# Altium PCB 400861.PcbDoc (part 5 of 7)
Units mm, origin at the board's own origin, x right, y up, seen from the top; angles counter-clockwise.
Board outline 145 x 63.5 mm, 8 copper layers (Top Side, Mid-Layer 1, Mid-Layer 2, Mid-Layer 3, Mid-Layer 4, Mid-Layer 5, Mid-Layer 6, Bottom Side), stack 1.529 mm thick; 287 components, 241 nets, 1164 pads, 3527 vias.
Unrouted connection lines stored in the file: 1.
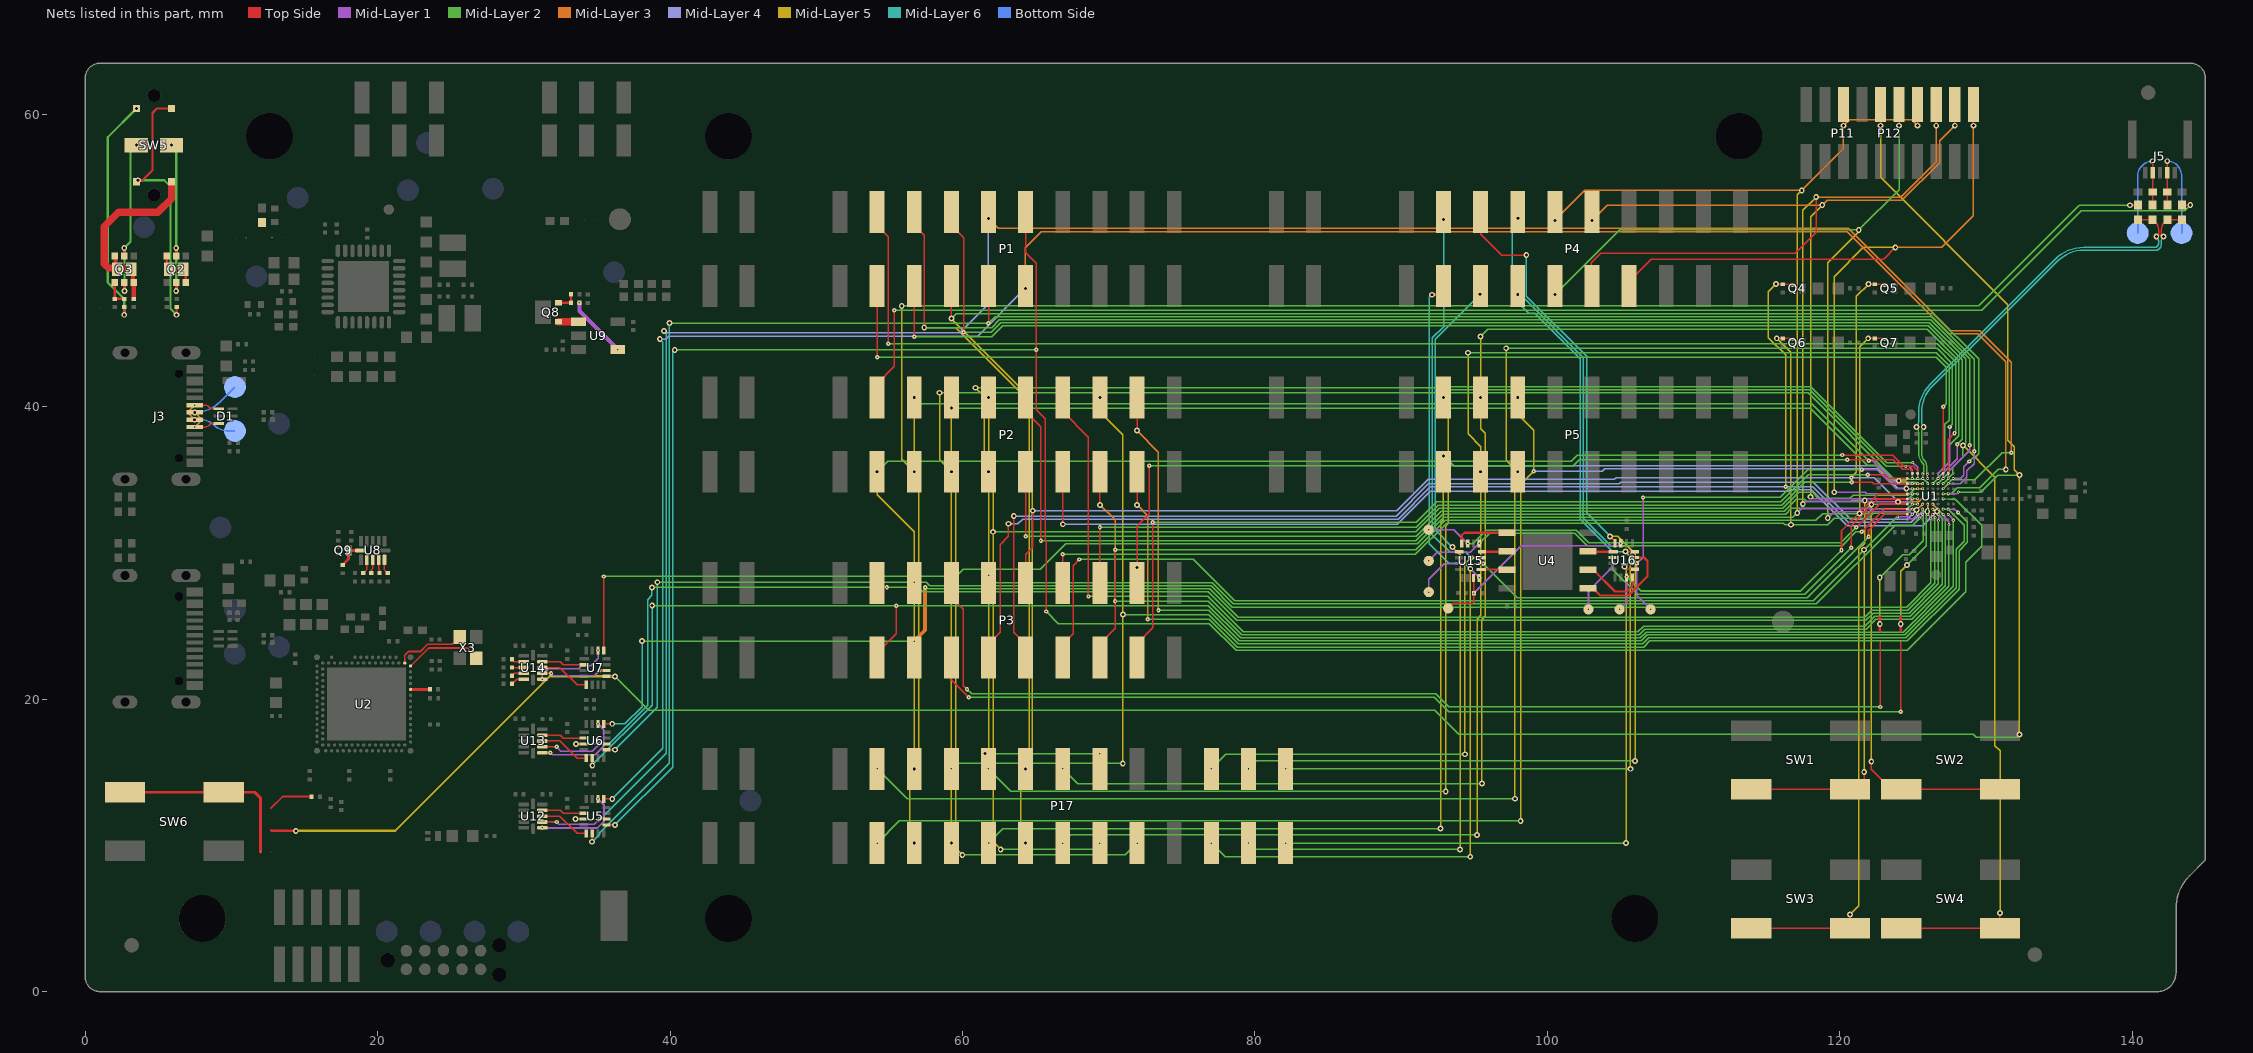
[diagram p10: the nets of this part, all layers, seen from the top]

## Via types
v1: diameter 0.4, hole 0.2, Top Side to Bottom Side, tented both sides, 2409 vias
v2: diameter 0.3, hole 0.1, Top Side to Mid-Layer 1, tented both sides, 307 vias
v3: diameter 0.3, hole 0.1, Mid-Layer 1 to Mid-Layer 2, tented both sides, 204 vias
v4: diameter 0.4, hole 0.2, Mid-Layer 3 to Mid-Layer 4, tented both sides, 199 vias
v5: diameter 0.3, hole 0.1, Mid-Layer 2 to Mid-Layer 3, tented both sides, 98 vias
v6: diameter 0.3, hole 0.1, Mid-Layer 4 to Mid-Layer 5, tented both sides, 82 vias
v7: diameter 0.3, hole 0.1, Mid-Layer 2 to Mid-Layer 3, 70 vias
v8: diameter 0.2, hole 0.1, Top Side to Mid-Layer 1, tented both sides, 64 vias
v9: diameter 0.2, hole 0.1, Mid-Layer 1 to Mid-Layer 2, tented both sides, 41 vias
v10: diameter 0.2, hole 0.1, Mid-Layer 2 to Mid-Layer 3, 17 vias
v11: diameter 0.2, hole 0.1, Mid-Layer 2 to Mid-Layer 3, tented both sides, 14 vias
v12: diameter 0.3, hole 0.1, Mid-Layer 5 to Mid-Layer 6, tented both sides, 12 vias
v13: diameter 0.2, hole 0.1, Mid-Layer 1 to Mid-Layer 2, 4 vias
v14: diameter 0.3, hole 0.1, Top Side to Mid-Layer 1, tented top, 3 vias
v15: diameter 0.2, hole 0.1, Top Side to Mid-Layer 1, tented top, 2 vias
v16: diameter 0.225, hole 0.1, Mid-Layer 1 to Mid-Layer 2, tented both sides, 1 vias

## Nets (pads, with @x,y where several pads share a name; then routed paths per layer and width w, separated by ;. In a path a pad name is that pad's centre, name@x,y a point inside that pad or via, vN(x,y) a via of type N, cw(c..) or ccw(c..) an arc to the next point about the centre after c; other vN are vias at no path point) (continued)
NetQ2_2: Q2.2 Q2.5 SW5.5 | length 11.2
  Top Side w0.15: v1(6.22,47.931) Q2.2@6.22,48.506 ; Q2.5@6.22,50.316 v1(6.22,50.862)
  Mid-Layer 2 w0.15: v1(5.9,57.9) 6.22,57.581 v1(6.22,50.862) v1(6.22,47.931)
NetQ2_3: Q2.3 Q2.6 | length 2.9
  Top Side w0.15: Q2.6@5.57,50.316 5.57,49.586 Q2.6@5.745,49.411 Q2.3@6.695,49.411 6.87,49.236 Q2.3@6.87,48.506
NetQ3_1: Q3.1 R22.2 R24.1 SB6.1 | length 1.8
  Top Side w0.15: Q3.1@2.02,48.506 R24.1@2.02,47.391 R22.2@2.675,47.391
NetQ3_2: Q3.2 Q3.5 SW5.2 | length 11.4
  Top Side w0.15: Q3.2@2.67,48.506 2.672,48.503 2.672,47.934 v1(2.675,47.931) ; Q3.5@2.67,50.316 v1(2.67,50.862)
  Mid-Layer 2 w0.15: v1(2.675,47.931) 2.675,50.857 v1(2.67,50.862) 3.1,51.292 3.1,57.5 v1(3.5,57.9)
NetQ3_3: Q3.3 Q3.6 R23.1 SW5.6 | length 14.7
  Top Side w0.3: Q3.6@2.02,50.316 2.072,50.264 2.072,49.534 Q3.6@2.195,49.411 ; Q3.3@3.145,49.411 3.268,49.288 3.268,48.558 Q3.3@3.32,48.506 R23.1@3.32,47.391
  Top Side w0.5: 1.438,49.655 1.3,49.793 ; 1.8,49.5 Q3.6@2.09,49.5 ; Q3.3@3.145,49.411 3.055,49.5 2.195,49.5 Q3.6@2.09,49.5 ; SW5.6@5.9,55.4 5.9,54.234 4.966,53.3 2.269,53.3 1.3,52.331 1.3,49.793 ; 1.3,49.793 1.593,49.5 Q3.6@2.09,49.5
NetQ8_1: Q8.1 U9.1 | length 1.4
  Top Side w0.508: Q8.1@32.368,45.816 U9.1@33.733,45.816
NetQ8_2: Q8.2 R52.1 R54.2 | length 1.4
  Top Side w0.152: Q8.2@32.368,47.116 R54.2@33.229,47.116 R52.1@33.229,47.693
NetQ9_3: Q9.3 R39.1 U8.12 | length 2
  Top Side w0.203: R39.1@17.601,29.189 18.01,29.598 Q9.3@18.01,30.176 U8.12@18.814,30.176
NetR6_2: R6.2 U8.2 | length 1
  Top Side w0.106: R6.2@19.007,28.62 19.264,28.878 U8.2@19.264,29.536
NetR8_1: R8.1 U2.L31 | length 1.3
  Top Side w0.2: U2.L31@22.25,20.675 R8.1@23.565,20.675
NetR12_2: R12.2 U8.3 | length 1
  Top Side w0.106: R12.2@19.567,28.622 19.567,28.841 19.664,28.938 U8.3@19.664,29.536
NetR13_2: R13.2 U8.4 | length 0.9
  Top Side w0.106: U8.4@20.064,29.536 20.064,28.881 20.128,28.817 R13.2@20.128,28.623
NetR16_1: R16.1 SB17.2 SB18.1
NetR21_2: R21.2 SW5.3 SW5.4 | length 18.5
  Top Side w0.15: v1(3.6,55.5) 3.918,55.5 4.6,56.182 4.6,60.1 4.9,60.4 SW5.4@5.9,60.4 ; v1(6.24,46.294) 6.245,46.299 R21.2@6.245,46.821
  Mid-Layer 2 w0.15: v1(3.6,55.5) 5.406,55.5 5.824,55.082 5.824,46.709 v1(6.24,46.294)
NetR22_1: R22.1 SW5.1 | length 15.9
  Top Side w0.15: v1(2.67,46.294) 2.675,46.299 R22.1@2.675,46.821
  Mid-Layer 2 w0.15: v1(2.67,46.294) 2.67,47.37 1.537,48.503 1.537,58.437 v1(3.5,60.4)
NetR35_1: R35.1 SB22.2 | length 3.1
  Top Side w0.125: SB22.2@12.7,12.55 13.491,13.341 R35.1@15.475,13.341
NetR47_2: R47.2 U8.5 | length 1
  Top Side w0.106: U8.5@20.464,29.536 20.464,28.848 R47.2@20.689,28.623
NetR48_2: R48.2 U14.2 | length 0.9
  Top Side w0.1: R48.2@29.178,22.731 29.342,22.567 U14.2@29.989,22.567
NetR49_2: R49.2 U14.3 | length 0.8
  Top Side w0.1: R49.2@29.178,22.174 29.185,22.167 U14.3@29.989,22.167
NetR50_2: R50.2 U14.4 | length 0.9
  Top Side w0.1: R50.2@29.178,21.617 29.328,21.767 U14.4@29.989,21.767
NetR54_1: R54.1 U9.4 | length 4.3
  Mid-Layer 1 w0.254: v2(33.799,47.116) 33.799,46.547 v2@36.43,43.916
  other v2: 36.433,43.916
NetR56_1: R56.1 SB5.2 TP34.1 U15.15 U16.15 | length 15.1
  Top Side w0.1: TP34.1@93.221,26.216 93.557,26.552 SB5.2@94.981,26.552 v2(94.981,27.262) 94.981,27.559 94.95,27.591 U15.15@94.95,28.308
  Mid-Layer 1 w0.1: v2(94.981,27.262) 98.206,30.487 104.84,30.487 v2(105.023,30.67)
NetR57_2: R57.2 U14.5 | length 0.9
  Top Side w0.1: R57.2@29.178,21.06 29.193,21.06 29.501,21.367 U14.5@29.989,21.367
NetSB22_1: SB22.1 SB25.2 SB26.1 SW6.2 | length 13.1
  Top Side w0.2: SW6.2@2.721,13.637 SW6.2@9.471,13.637 11.587,13.637 12,13.224 SB22.1@12,12.55 SB25.2@12,11.05 SB26.1@12,9.55
NetU2_B30: U2.B30 X3.3 | length 4.8
  Top Side w0.125: U2.B30@21.85,22.475 21.85,23.023 22.09,23.263 22.908,23.263 23.408,23.763 25.108,23.763 X3.3@25.6,24.255
NetU2_C31: U2.C31 X3.1 | length 5.3
  Top Side w0.125: U2.C31@22.25,22.275 22.274,22.275 23.512,23.513 26.109,23.513 26.75,22.872 X3.1@26.75,22.805
NetU5_2: U5.2 U12.10 | length 2.9
  Top Side w0.1: U12.10@31.269,12.406 32.488,12.406 32.688,12.206 U5.2@34.095,12.206
NetU5_5: U5.5 U12.9 | length 3.5
  Top Side w0.1: U12.9@31.269,12.006 32.462,12.006 33.637,10.831 U5.5@34.27,10.831
NetU5_10: U5.10 U12.8 | length 5
  Top Side w0.1: U12.8@31.269,11.606 v2(32.238,11.606) ; v2(35.173,11.806) U5.10@35.645,11.806
  Mid-Layer 1 w0.1: 31.857,11.606 v2(32.238,11.606) 32.402,11.442 34.809,11.442 v2(35.173,11.806)
NetU5_14: U5.14 U12.7 | length 6.1
  Top Side w0.125: v2(31.264,11.206) U12.7@31.269,11.206
  Mid-Layer 1 w0.125: v2(31.264,11.206) 35.034,11.206 35.487,11.658 35.487,12.764 v2(35.07,13.181)
NetU6_2: U6.2 U13.10 | length 2.9
  Top Side w0.1: U13.10@31.269,17.546 32.488,17.546 32.688,17.346 U6.2@34.095,17.346
NetU6_5: U6.5 U13.9 | length 3.5
  Top Side w0.1: U13.9@31.269,17.146 32.462,17.146 33.637,15.971 U6.5@34.27,15.971
NetU6_10: U6.10 U13.8 | length 4.7
  Top Side w0.1: U13.8@31.269,16.746 v2(32.238,16.746) ; v2(35.173,16.946) U6.10@35.645,16.946
  Mid-Layer 1 w0.1: v2(32.238,16.746) 32.536,16.449 34.675,16.449 v2(35.173,16.946)
NetU6_14: U6.14 U13.7 | length 6.2
  Top Side w0.1: U13.7@31.269,16.346 v2(31.814,16.346)
  Mid-Layer 1 w0.1: v2(31.814,16.346) 31.961,16.199 34.877,16.199 35.473,16.795 35.473,17.918 v2(35.07,18.322)
NetU7_2: U7.2 U14.10 | length 2.9
  Top Side w0.1: U14.10@31.269,22.567 32.488,22.567 32.688,22.367 U7.2@34.095,22.367
NetU7_5: U7.5 U14.9 | length 3.5
  Top Side w0.1: U14.9@31.269,22.167 32.462,22.167 33.637,20.992 U7.5@34.27,20.992
NetU7_10: U7.10 U14.8 | length 4.6
  Top Side w0.1: U14.8@31.269,21.767 v2(31.857,21.767) ; v2(35.173,21.967) U7.10@35.645,21.967
  Mid-Layer 1 w0.1: v2(31.857,21.767) 32.013,21.612 34.817,21.612 v2(35.173,21.967)
NetU7_14: U7.14 U14.7 | length 5.1
  Top Side w0.1: v2(31.269,21.369) v2(31.269,21.369)
  Mid-Layer 1 w0.1: v2(31.269,21.369) 31.269,21.688 31.676,22.095 33.756,22.095 33.959,22.298 34.573,22.298 35.07,22.794 v2(35.07,23.342)
NFC1_N: C56.1 J5.2 R33.2 TP26.1 | length 8.5
  Top Side w0.1: R33.2@142.4,53.8 142.4,54.055 142.4,54.495 C56.1@142.4,54.7 142.4,54.905 J5.2@142.4,56 v1(142.4,56.8)
  Bottom Side w0.1: v1(142.4,56.8) cw(c142.4,55.825) 143.376,55.825 TP26.1@143.376,51.885
NFC2_P: C57.2 J5.4 R34.2 TP28.1 | length 8.5
  Top Side w0.1: R34.2@141.4,53.8 141.4,54.055 141.4,54.495 C57.2@141.4,54.7 141.4,54.905 J5.4@141.4,56 v1(141.4,56.8)
  Bottom Side w0.1: TP28.1@140.376,51.885 140.376,55.776 cw(c141.4,55.776) v1(141.4,56.8)
NFC_N: R3.2 R33.1 U1.J6 | length 29.4
  Top Side w0.1: v1(142.15,51.656) 142.003,51.656 142,51.659 142,52.143 cw(c142.621,52.143) 142.182,52.582 R33.1@142.4,52.8 R3.2@143.4,52.8
  Mid-Layer 1 w0.1: v13(125.985,35.392) 125.985,35.186 ccw(c126.106,35.186) v8(126.02,35.1)
  Mid-Layer 2 w0.1: v5(125.741,38.611) ccw(c126.103,38.248) 125.591,38.248 125.591,36.817 ccw(c126.299,36.817) 125.798,36.316 cw(c125.468,35.985) 125.935,35.985 125.935,35.513 ccw(c126.105,35.513) v13(125.985,35.392)
  Mid-Layer 6 w0.1: v5(125.741,38.611) cw(c126.103,38.973) 125.591,38.973 125.591,39.616 cw(c128.131,39.616) 126.335,41.412 128.973,44.05 128.975,44.05 129.297,44.372 129.297,44.374 134.887,49.964 cw(c136.683,48.168) 136.683,50.708 141.598,50.708 ccw(c141.598,51.055) 141.843,50.809 141.904,50.871 ccw(c141.674,51.102) 142,51.102 142,51.35 cw(c142.375,51.35) 142.11,51.616 v1(142.15,51.656)
  other v4: 125.741,38.611
  other v6: 125.741,38.611
  other v12: 125.741,38.611
NFC_P: R4.2 R34.1 U1.J7 | length 29.3
  Top Side w0.1: R4.2@140.4,52.8 R34.1@141.4,52.8 141.618,52.582 cw(c141.179,52.143) 141.8,52.143 141.8,51.659 141.797,51.656 v1(141.65,51.656)
  Mid-Layer 1 w0.1: v8(125.67,35.1) ccw(c125.635,35.136) 125.685,35.136 v13(125.685,35.4)
  Mid-Layer 2 w0.1: v5(125.241,38.611) cw(c124.878,38.248) 125.391,38.248 125.391,36.817 ccw(c126.299,36.817) 125.657,36.174 cw(c125.468,35.985) 125.735,35.985 125.735,35.521 cw(c125.564,35.521) v13(125.685,35.4)
  Mid-Layer 6 w0.1: v5(125.241,38.611) ccw(c124.878,38.973) 125.391,38.973 125.391,39.616 cw(c128.131,39.616) 126.193,41.553 127.55,42.91 128.89,44.25 128.892,44.25 129.097,44.455 129.097,44.457 134.745,50.105 cw(c136.683,48.168) 136.683,50.908 141.563,50.908 ccw(c141.563,51.139) 141.726,50.976 ccw(c141.548,51.154) 141.8,51.154 141.8,51.35 ccw(c141.425,51.35) 141.69,51.616 v1(141.65,51.656)
  other v4: 125.241,38.611
  other v6: 125.241,38.611
  other v12: 125.241,38.611
nRF54_N: D1.4 J3.A7 J3.B7 TP22.1 | length 6
  Top Side w0.099: v2(7.485,40.12) 8.127,40.12 cw(c8.127,39.554) 8.527,39.955 ccw(c8.73,40.158) 8.73,39.87 D1.4@9.135,39.87
  Mid-Layer 3 w0.09: v1(7.484,39.12) 7.203,39.401 cw(c7.438,39.636) 7.105,39.636 cw(c7.356,39.636) 7.179,39.814 v2(7.485,40.12)
  Bottom Side w0.099: v1(7.484,39.12) 7.942,39.12 cw(c7.942,37.927) 8.785,38.77 ccw(c9.793,39.778) 9.793,38.353 TP22.1@10.236,38.353
  other v3: 7.485,40.12
  other v5: 7.485,40.12
nRF54_P: D1.6 J3.A6 J3.B6 TP23.1 | length 6.4
  Top Side w0.099: v2(7.485,38.621) 8.174,38.621 ccw(c8.174,39.109) 8.519,38.764 cw(c8.776,38.507) 8.776,38.87 D1.6@9.135,38.87
  Mid-Layer 3 w0.09: v2(7.485,38.621) 7.791,38.927 ccw(c7.614,39.105) 7.865,39.105 ccw(c7.532,39.105) 7.767,39.34 v1(7.487,39.62)
  Bottom Side w0.099: v1@7.485,39.62 ccw(c7.485,42.08) 9.224,40.341 TP23.1@10.236,41.353
  other v3: 7.485,38.621
  other v5: 7.485,38.621
nRF54_RESET: P11.10 P12.10 SB25.1 U1.F2 U7.9 | length 178.8
  Top Side w0.1: U7.9@35.645,21.567 v1(36.221,21.567) ; v1(122.787,59.228) P12.10@122.787,60.676
  Top Side w0.15: SB25.1@12.7,11.05 12.75,11 v1(14.4,11)
  Mid-Layer 1 w0.1: v8(127.42,34.05) 127.994,34.05 v13(128.11,34.166)
  Mid-Layer 2 w0.1: v1(36.221,21.567) 38.549,19.239 92.304,19.239 93.943,17.6 129.13,17.6 129.327,17.403 132.09,17.403 v5(132.287,17.6) ; v13(128.11,34.166) 129.635,34.166 130.805,35.336 v5(132.289,35.336)
  Mid-Layer 5 w0.1: v1(122.787,59.228) 122.787,55.714 131.503,46.998 131.503,37.71 131.942,37.271 131.942,35.683 v5(132.289,35.336) ; v5(132.287,17.6) v6@132.287,35.335
  Mid-Layer 5 w0.15: v1(14.4,11) 21.2,11 31.767,21.567 v1(36.221,21.567)
  other v4: 132.287,17.6 132.289,35.336
  other v6: 132.287,17.6 132.289,35.336
P0.00: P1.3 U1.K3 | length 85.1
  Top Side w0.1: v2(54.16,43.393) 54.16,43.682 ; 54.16,43.596 54.16,43.682 ; P1.3@54.16,47.67 54.16,43.682 ; U1.K3@127.07,35.45 v3(127.071,40.004)
  Mid-Layer 2 w0.1: v2(54.16,43.393) 126.588,43.393 127.268,42.713 127.268,40.202 v3(127.071,40.004)
  other v2: 127.071,40.004
  other v3: 54.16,43.393
P0.01: P1.4 U1.K2 | length 90.1
  Top Side w0.1: P1.4@54.16,52.75 54.16,52.397 54.912,51.645 v2@54.912,44.321 ; U1.K2@127.42,35.45 127.42,37.756 v3(127.846,38.182)
  Mid-Layer 2 w0.1: v2(54.911,44.321) 126.675,44.321 127.923,43.074 127.923,38.259 v3(127.846,38.182)
  other v2: 127.846,38.182
  other v3: 54.911,44.321
P0.02: P1.5 U1.J3 | length 84.5
  Top Side w0.1: v2(56.7,44.799) P1.5@56.7,47.67
  Mid-Layer 1 w0.1: v8(127.07,35.1) 127.07,35.505 128.025,36.459 128.025,36.832 v3(128.025,37.438)
  Mid-Layer 2 w0.1: v2(56.7,44.799) 61.989,44.799 62.745,45.556 126.047,45.556 128.384,43.219 128.384,37.797 v3(128.025,37.438)
  other v3: 56.7,44.799
P0.03: P1.6 P17.11 U1.J2 | length 129.1
  Top Side w0.1: P1.6@56.7,52.75 56.7,52.414 57.383,51.731 v3(57.383,45.422)
  Mid-Layer 1 w0.1: v8(127.419,35.102) 127.419,35.558 128.884,37.023 v3(128.884,37.379)
  Mid-Layer 2 w0.1: v3(57.383,45.422) 61.992,45.422 62.526,45.956 126.233,45.956 128.884,43.305 v3(128.884,37.379)
  Mid-Layer 5 w0.1: v3(57.383,45.422) 59.551,45.422 64.578,40.395 64.578,15.964 63.999,15.385 63.999,10.481 v6(64.32,10.16)
  other v2: 64.32,10.16 57.383,45.422
  other v3: 64.32,10.16
  other v4: 64.32,10.16 57.383,45.422
  other v5: 64.32,10.16 57.383,45.422
  other v6: 57.383,45.422
P0.04: P1.7 P17.12 U1.J1 | length 115.8
  Top Side w0.1: v3(59.24,46.041) P1.7@59.24,47.67
  Mid-Layer 1 w0.1: v15(127.77,35.1) 128.266,35.1 128.488,35.322 128.488,35.886 v3(128.866,36.264)
  Mid-Layer 2 w0.1: v3(59.24,46.041) 59.583,46.384 126.387,46.384 129.497,43.273 129.497,36.79 129.322,36.614 129.217,36.614 v3(128.866,36.264)
  Mid-Layer 5 w0.1: v3(59.24,46.041) 64.785,40.496 64.785,15.705 v2(64.32,15.24)
  other v2: 59.24,46.041
  other v3: 64.32,15.24
  other v4: 64.32,15.24 59.24,46.041
  other v5: 64.32,15.24 59.24,46.041
  other v6: 64.32,15.24 59.24,46.041
P0.05: P1.8 SW4.2 U1.H3 | length 127.8
  Top Side w0.1: P1.8@59.24,52.75 59.24,52.392 60.081,51.551 v2(60.081,45.114) ; SW4.2@124.209,4.35 SW4.2@130.959,4.35 130.959,5.376 v1(130.961,5.378)
  Mid-Layer 2 w0.1: v2(60.081,45.114) 61.975,45.114 62.617,45.756 126.137,45.756 128.606,43.287 128.606,37.537 v5(128.428,37.359) 128.428,36.567 127.742,35.881 127.742,35.422 v9(127.07,34.75)
  Mid-Layer 5 w0.1: v6@128.444,37.359 130.608,35.195 130.608,16.826 130.961,16.473 v1(130.961,5.378)
  other v3: 60.081,45.114
  other v4: 128.428,37.359
  other v6: 128.428,37.359
  other v8: 127.07,34.75
P0.06: P1.9 U1.H2 U5.6 | length 140.6
  Top Side w0.1: v1(34.67,10.255) U5.6@34.67,10.831 ; v3(61.771,45.723) 61.78,45.733 P1.9@61.78,47.67
  Mid-Layer 1 w0.1: v8(127.42,34.75) 128.256,34.75 128.693,35.187 128.693,35.615 129.197,36.119 v3(129.197,36.964)
  Mid-Layer 2 w0.1: v5(39.949,45.723) 40.841,45.723 v3(61.771,45.723) 62.225,46.178 126.302,46.178 129.209,43.27 129.209,36.976 v3(129.197,36.964)
  Mid-Layer 6 w0.1: v1(34.67,10.255) 35.18,10.765 35.18,10.87 39.949,15.64 v5(39.949,45.723)
  other v2: 61.771,45.723
  other v4: 39.949,45.723
  other v6: 39.949,45.723
  other v12: 39.949,45.723
P0.07: P1.10 U1.G3 U5.3 | length 152.4
  Top Side w0.1: v1(33.519,11.806) U5.3@34.095,11.806
  Mid-Layer 2 w0.095: v9(127.07,34.4) 127.669,34.999
  Mid-Layer 2 w0.1: 127.669,34.999 129.245,34.999 131.105,36.859 131.729,36.859 v5(131.735,36.865)
  Mid-Layer 3 w0.1: v1(61.775,52.875) 62.45,52.2 120.591,52.2 127.591,45.2 129.569,45.2 131.735,43.034 v5(131.735,36.865)
  Mid-Layer 4 w0.1: v12(39.578,45.181) 39.702,45.057 59.825,45.057 61.775,47.007 v1(61.775,52.875)
  Mid-Layer 6 w0.1: v1(33.519,11.806) 35.232,11.806 39.745,16.319 39.745,45.014 v12(39.578,45.181)
  other v4: 39.578,45.181
  other v6: 39.578,45.181
  other v8: 127.07,34.4
P0.08: P1.11 U1.F3 U5.13 | length 146.3
  Top Side w0.1: U5.13@35.47,13.181 v1(36.046,13.181)
  Mid-Layer 2 w0.1: v9(127.07,34.05) 127.625,34.05 128.026,34.451 129.562,34.451 130.827,35.716 v1(131.357,35.716)
  Mid-Layer 3 w0.1: v1(64.3,48.1) 64.3,50.879 65.393,51.972 120.522,51.972 127.495,44.998 129.446,44.998 131.357,43.088 v1(131.357,35.716)
  Mid-Layer 4 w0.1: v12(39.298,44.636) 39.71,44.636 39.911,44.837 61.036,44.837 v1(64.3,48.1)
  Mid-Layer 6 w0.1: v1(36.046,13.181) 39.511,16.646 39.511,44.423 v12(39.298,44.636)
  other v4: 39.298,44.636
  other v6: 39.298,44.636
  other v8: 127.07,34.05
P0.09: P1.12 U1.E3 U5.9 | length 160.8
  Top Side w0.1: U5.9@35.645,11.406 v1(36.221,11.406) ; P1.12@64.32,52.75 64.32,50.547 65.043,49.824 v2(65.043,43.898) 65.043,39.807 65.662,39.188 65.662,30.913 65.722,30.854 v3(65.722,26.003)
  Mid-Layer 2 w0.1: v5(40.316,43.898) 41.423,43.898 v2(65.043,43.898) ; v3(65.722,26.003) 66.554,25.172 76.89,25.172 78.706,23.356 124.617,23.356 128.608,27.347 128.608,29.37 129.699,30.461 129.699,31.911 127.915,33.695 127.468,33.695 v8(127.07,33.7)
  Mid-Layer 6 w0.1: v1(36.221,11.406) 40.179,15.364 40.179,43.761 v5(40.316,43.898)
  other v2: 65.722,26.003
  other v3: 65.043,43.898
  other v4: 40.316,43.898
  other v6: 40.316,43.898
  other v9: 127.07,33.7
  other v12: 40.316,43.898
P1.00: P2.3 P17.5 U1.K8 | length 99
  Top Side w0.1: v2(120.167,36.705) 123.612,36.705 124.386,35.93 125.011,35.93 125.32,35.621 U1.K8@125.32,35.45
  Mid-Layer 2 w0.1: v6(54.161,35.559) 54.892,36.29 101.643,36.29 102.059,36.705 v2(120.167,36.705)
  Mid-Layer 5 w0.1: v6(54.161,35.559) 54.161,34.003 56.7,31.464 56.7,15.674 56.397,15.371 56.397,10.463 v6(56.7,10.16)
  other v2: 56.7,10.16 54.161,35.559
  other v3: 56.7,10.16 54.161,35.559 120.167,36.705
  other v4: 56.7,10.16 54.161,35.559
  other v5: 56.7,10.16 54.161,35.559
P1.01: P2.4 R3.1 | length 99.2
  Top Side w0.1: P2.4@54.16,40.05 54.16,41.584 55.343,42.767 v2(55.343,46.6) ; R3.1@143.4,53.8 143.404,53.805 v1(143.97,53.805)
  Mid-Layer 2 w0.1: v2(55.343,46.6) 129.7,46.6 136.516,53.416 143.581,53.416 v1(143.97,53.805)
  other v3: 55.343,46.6
P1.02: P2.5 R4.1 | length 99.1
  Top Side w0.1: v1(139.841,53.786) 140.386,53.786 R4.1@140.4,53.8
  Mid-Layer 2 w0.1: v5(55.842,46.902) 129.502,46.902 136.357,53.757 cw(c136.427,53.686) 136.427,53.786 v1(139.841,53.786)
  Mid-Layer 5 w0.1: v5(55.842,46.902) 55.842,36.418 v6(56.7,35.56)
  other v2: 56.7,35.56
  other v3: 56.7,35.56
  other v4: 56.7,35.56 55.842,46.902
  other v5: 56.7,35.56
  other v6: 55.842,46.902
P1.03: P2.6 P17.6 U1.H9 | length 96.4
  Mid-Layer 1 w0.1: v3(121.995,36.314) 122.252,36.314 123.816,34.75 v8(124.97,34.75)
  Mid-Layer 2 w0.1: v3(56.7,40.64) 57.115,40.225 118.084,40.225 v3(121.995,36.314)
  Mid-Layer 5 w0.1: v6@56.69,40.64 56.69,36.548 57,36.238 57,15.54 v6(56.7,15.24)
  other v2: 56.7,15.24 56.7,40.64
  other v3: 56.7,15.24
  other v4: 56.7,15.24 56.7,40.64
  other v5: 56.7,15.24 56.7,40.64
  other v6: 56.7,40.64
P1.04: P2.7 P17.7 U1.J9 | length 100.6
  Mid-Layer 1 w0.1: v9(124.513,35.925) 124.744,35.925 124.97,35.699 v8(124.97,35.1)
  Mid-Layer 2 w0.1: v5(58.431,40.964) 92.387,40.963 92.582,41.159 117.944,41.159 123.177,35.925 v9(124.513,35.925)
  Mid-Layer 5 w0.1: v5(58.431,40.964) 58.431,36.369 v6(59.24,35.56) v6(59.24,10.16)
  other v2: 59.24,10.16 59.24,35.56
  other v3: 59.24,10.16 59.24,35.56
  other v4: 59.24,10.16 59.24,35.56 58.431,40.964
  other v5: 59.24,10.16 59.24,35.56
  other v6: 58.431,40.964
P1.05: P2.8 P17.17 U1.H8 | length 111.4
  Mid-Layer 1 w0.1: v8@125.297,34.727 v9(125.32,34.75)
  Mid-Layer 2 w0.1: v3(59.24,39.914) 117.968,39.914 121.879,36.003 122.454,36.003 123.606,34.851 125.212,34.851 125.313,34.75 v9(125.32,34.75) ; v6(59.985,9.354) 71.134,9.354 v3(71.94,10.16)
  Mid-Layer 5 w0.1: v3(59.24,39.914) 59.24,36.023 59.541,35.722 59.541,9.799 v6(59.985,9.354)
  other v2: 71.94,10.16 59.24,39.914
  other v4: 59.985,9.354 59.24,39.914
  other v5: 59.985,9.354 59.24,39.914
  other v6: 59.24,39.914
  other v8: 125.32,34.75
P1.06: P2.9 P17.16 U1.J8 | length 100.8
  Mid-Layer 1 w0.1: v9(124.991,36.181) 125.32,35.852 v8(125.32,35.1)
  Mid-Layer 2 w0.1: v5(60.888,41.304) 92.4,41.304 92.466,41.37 118.024,41.37 123.213,36.181 v9(124.991,36.181) ; v6(61.542,16.278) v3(69.391,16.278)
  Mid-Layer 5 w0.1: v5(60.888,41.304) 61.475,40.717 61.475,35.865 v6(61.78,35.56) 61.78,16.516 v6(61.542,16.278)
  other v2: 69.391,16.278 61.78,35.56
  other v3: 61.78,35.56
  other v4: 61.542,16.278 61.78,35.56 60.888,41.304
  other v5: 61.542,16.278 61.78,35.56
  other v6: 60.888,41.304
P1.07: P2.10 P17.15 U1.G8 | length 103
  Mid-Layer 2 w0.1: v5(62.09,31.454) 91,31.454 92.607,33.06 116.115,33.06 117.202,34.147 118.146,34.147 118.539,33.754 120.696,33.754 120.909,33.967 124.698,33.967 125.131,34.4 v8(125.32,34.4) ; v6(62.612,9.726) 68.966,9.726 v3(69.4,10.16)
  Mid-Layer 5 w0.1: v6(61.78,40.64) 61.78,36.148 62.097,35.832 62.097,31.46 v5(62.09,31.454) 62.09,10.248 v6(62.612,9.726)
  other v2: 69.4,10.16 61.78,40.64
  other v3: 61.78,40.64
  other v4: 62.612,9.726 62.09,31.454 61.78,40.64
  other v5: 62.612,9.726 61.78,40.64
  other v6: 62.09,31.454
  other v9: 125.32,34.4
P1.08: P2.11 SW3.2 U1.F8 | length 102.6
  Top Side w0.1: v2(64.32,31.148) P2.11@64.32,34.97 ; SW3.2@113.948,4.35 SW3.2@120.698,4.35 v1(120.698,5.273)
  Mid-Layer 2 w0.1: v2(64.32,31.148) 91.037,31.148 92.745,32.856 116.209,32.856 117.04,33.687 117.566,33.687 117.71,33.543 120.796,33.543 120.854,33.6 v6(121.706,33.6) 121.806,33.7 124.715,33.7 125.065,34.05 v9(125.32,34.05)
  Mid-Layer 5 w0.1: v1(120.698,5.273) 121.306,5.881 121.306,30.287 121.706,30.687 v6(121.706,33.6)
  other v3: 64.32,31.148
  other v4: 121.706,33.6
  other v5: 121.706,33.6
  other v8: 125.32,34.05
P1.09: P2.12 SW2.2 U1.E8 | length 98.3
  Top Side w0.1: P2.12@64.32,40.05 64.32,39.684 65.366,38.638 v2(65.366,30.836) ; v1(122.158,15.743) 122.158,15.229 123.587,13.8 SW2.2@124.3,13.8 ; SW2.2@124.3,13.85 SW2.2@130.959,13.85
  Mid-Layer 2 w0.1: v2(65.366,30.836) 91.012,30.836 92.83,32.655 116.298,32.655 116.696,33.052 121.882,33.052 v6(122.158,33.329) 122.159,33.327 124.632,33.327 125.005,33.7 v9(125.32,33.7)
  Mid-Layer 5 w0.1: v1(122.158,15.743) v6(122.158,33.329)
  other v3: 65.366,30.836
  other v4: 122.158,33.329
  other v5: 122.158,33.329
  other v8: 125.32,33.7
P1.10: P2.13 U1.D5 | length 65.8
  Top Side w0.1: v4(66.86,31.967) P2.13@66.86,34.97
  Mid-Layer 3 w0.1: v8(126.37,33.35) 126.648,33.073 v4(126.648,32.852)
  Mid-Layer 4 w0.1: v4(66.86,31.967) 89.727,31.967 91.987,34.227 116.502,34.227 116.607,34.332 118.047,34.332 120.499,31.881 125.676,31.881 v4(126.648,32.852)
  other v2: 66.86,31.967
  other v3: 66.86,31.967
  other v5: 66.86,31.967
  other v9: 126.37,33.35
  other v11: 126.37,33.35
P1.11: P2.14 U1.C5 | length 79.8
  Top Side w0.1: P2.14@66.86,40.05 66.86,39.689 68.616,37.933 v3(68.616,27.03)
  Mid-Layer 2 w0.1: v3@68.667,27.03 76.779,27.03 79.195,24.614 106.197,24.614 106.584,25.001 121.71,25.001 122.38,25.671 124.815,25.671 127.002,27.859 127.002,32.365 126.37,32.997 v9(126.37,33)
  other v2: 68.616,27.03
  other v8: 126.37,33
P1.12: P2.15 U1.C4 | length 73.2
  Top Side w0.1: v1(69.4,33.294) P2.15@69.4,34.97
  Mid-Layer 2 w0.1: v5(70.433,26.702) 76.82,26.702 79.111,24.41 106.281,24.41 106.671,24.801 121.802,24.801 122.47,25.47 124.91,25.47 127.202,27.761 127.202,32.48 126.72,32.962 v8(126.72,33)
  Mid-Layer 3 w0.1: v1(69.4,33.294) 70.433,32.261 v5(70.433,26.702)
  other v9: 126.72,33
P1.13: P2.16 P17.8 U1.C3 | length 103.4
  Mid-Layer 1 w0.1: v8(127.07,33) 127.073,33 v9@127.074,33.001
  Mid-Layer 2 w0.1: v2(59.24,15.24) 59.608,15.608 v6(70.964,15.608) ; v5(70.966,25.792) 76.856,25.792 78.862,23.786 106.527,23.786 106.931,24.19 124.52,24.19 127.969,27.639 127.969,30.25 128.531,30.811 128.531,31.907 127.436,33.001 127.071,33.001 v8(127.07,33)
  Mid-Layer 5 w0.1: v6(69.4,40.64) 69.4,39.665 70.966,38.099 v5(70.966,25.792) 70.966,15.611 v6(70.964,15.608)
  other v2: 69.4,40.64
  other v3: 59.24,15.24 69.4,40.64
  other v4: 70.964,15.608 70.966,25.792 69.4,40.64
  other v5: 70.964,15.608 69.4,40.64
  other v6: 70.966,25.792
  other v9: 127.07,33
P1.14: P2.17 U1.C2 | length 74.2
  Top Side w0.1: v1(71.94,33.294) P2.17@71.94,34.97
  Mid-Layer 1 w0.1: v8(127.42,33) 127.865,33 v3(128.089,32.776)
  Mid-Layer 2 w0.1: v5(72.671,25.485) 76.874,25.485 78.79,23.568 106.593,23.568 107.01,23.985 124.63,23.985 128.18,27.535 128.18,30.171 128.734,30.725 128.734,32.131 v3@128.094,32.772
  Mid-Layer 3 w0.1: v1(71.94,33.294) 72.671,32.563 v5(72.671,25.485)
P1.15: P2.18 U1.B2 | length 76.4
  Top Side w0.1: v1(71.94,38.374) P2.18@71.94,40.05
  Mid-Layer 1 w0.1: v8(127.42,32.65) 127.758,32.313 v16(127.758,32.238)
  Mid-Layer 2 w0.1: v5(73.403,26.095) 76.838,26.095 78.94,23.993 106.439,23.993 106.841,24.395 124.428,24.395 127.763,27.73 127.763,32.233 v16(127.758,32.238)
  Mid-Layer 3 w0.1: v1(71.94,38.374) 73.403,36.911 v5(73.403,26.095)
P1.16: P3.3 U1.B3 U6.6 | length 113.9
  Top Side w0.1: U6.6@34.67,15.971 34.67,15.486 v1(34.679,15.477) ; P3.3@54.16,22.27 54.16,23.19 55.46,24.49 v2(55.46,26.384)
  Mid-Layer 1 w0.1: v8(127.07,32.65) 127.07,32.536 127.461,32.145 v9(127.461,31.949)
  Mid-Layer 2 w0.1: v5(38.776,26.401) v3@55.443,26.401 ; v2(55.46,26.384) v3@55.443,26.401 ; v9(127.461,31.949) 127.461,27.728 124.333,24.599 106.753,24.599 106.352,24.199 79.024,24.199 76.822,26.401 v3@55.443,26.401
  Mid-Layer 6 w0.1: v1(34.679,15.477) 34.679,15.507 38.776,19.604 v5(38.776,26.401)
  other v3: 55.46,26.384
  other v4: 38.776,26.401
  other v6: 38.776,26.401
  other v12: 38.776,26.401
P1.17: P3.4 U1.B4 U6.3 | length 110.4
  Top Side w0.1: v1(33.571,16.946) U6.3@34.095,16.946 ; P3.4@54.16,27.35 54.465,27.654 v2(54.832,27.654)
  Mid-Layer 1 w0.1: v8(126.72,32.65) 126.72,32.581 126.777,32.524 126.777,32.317 126.72,32.26 126.72,32.254 v9(126.752,32.222) v9@126.752,32.291
  Mid-Layer 2 w0.1: v5(38.757,27.654) v2(54.832,27.654) 56.975,27.654 57.285,27.344 76.798,27.344 78.753,25.389 121.788,25.389 122.283,25.884 124.736,25.884 126.752,27.901 v9(126.752,32.222)
  Mid-Layer 6 w0.1: v1(33.571,16.946) 35.826,16.946 38.462,19.583 38.462,26.81 38.757,27.105 v5(38.757,27.654)
  other v3: 54.832,27.654
  other v4: 38.757,27.654
  other v6: 38.757,27.654
  other v12: 38.757,27.654
P1.18: P3.5 U1.B5 U6.13 | length 105.9
  Top Side w0.1: U6.13@35.47,18.322 v1(36.046,18.322)
  Mid-Layer 1 w0.1: v8(126.37,32.65) 126.532,32.424 v9@126.528,32.421
  Mid-Layer 2 w0.1: v5(38.082,23.976) v5(56.7,23.976) ; v5(57.44,27.664) 57.551,27.553 76.9,27.553 78.855,25.598 121.705,25.598 122.202,26.095 124.645,26.095 126.482,27.932 126.482,32.312 cw(c126.635,32.312) v9(126.527,32.421) v9@126.508,32.402
  Mid-Layer 3 w0.254: v5(56.7,23.976) 57.44,24.716 v5(57.44,27.664)
  Mid-Layer 6 w0.1: v1(36.046,18.322) 36.901,18.322 38.082,19.503 v5(38.082,23.976)
  other v2: 56.7,23.976
  other v3: 56.7,23.976
  other v4: 38.082,23.976
  other v6: 38.082,23.976
  other v12: 38.082,23.976
P1.19: P3.6 U1.B6 U6.9 | length 106.5
  Top Side w0.1: U6.9@35.645,16.546 v1(36.221,16.546)
  Mid-Layer 1 w0.1: v8(126.02,32.65) 126.02,32.647 126.211,32.456 126.211,32.392 v9(126.225,32.379)
  Mid-Layer 2 w0.1: v5(39.126,28.004) v2(56.7,28.004) 57.528,28.004 57.772,27.759 77.004,27.759 78.455,26.308 124.573,26.308 126.225,27.96 v9(126.225,32.379)
  Mid-Layer 6 w0.1: v1(36.221,16.546) 39.126,19.452 v5(39.126,28.004)
  other v3: 56.7,28.004
  other v4: 39.126,28.004
  other v6: 39.126,28.004
  other v12: 39.126,28.004
P1.20: P3.7 SB3.2 | length 71.6
  Top Side w0.1: P3.7@59.24,22.27 59.24,21.325 v3(60.437,20.128) ; v2@124.172,19.175 SB3.2@124.172,23.95
  Mid-Layer 2 w0.1: v3(60.437,20.128) 92.276,20.128 93.255,19.149 v3@124.171,19.149 ; v3@124.171,19.174 v3@124.172,19.175
  other v2: 124.172,19.15 60.437,20.128
  other v3: 124.172,19.15
P1.20/XL1: SB1.1 SB3.1 U1.C6 | length 9.7
  Top Side w0.15: 124.138,25.616 SB1.1@124.172,25.65
  Top Side w0.152: SB3.1@124.172,24.65 v2(124.172,25.15) SB1.1@124.172,25.65
  Mid-Layer 2 w0.1: v6(124.596,29.171) 125.914,30.489 125.914,32.867 126.02,32.973 v9(126.02,33)
  Mid-Layer 5 w0.1: v2(124.172,25.15) 124.172,28.747 v6(124.596,29.171)
  other v3: 124.172,25.15
  other v4: 124.172,25.15 124.596,29.171
  other v5: 124.172,25.15 124.596,29.171
  other v6: 124.172,25.15
  other v8: 126.02,33
P1.21: P3.8 SB4.2 | length 74.6
  Top Side w0.1: P3.8@59.24,27.35 59.24,26.979 60.067,26.152 60.067,20.931 v2(60.307,20.691) ; P3.8@59.24,27.94 P3.8@59.263,27.917 ; v2(122.771,19.471) 122.772,19.473 SB4.2@122.772,23.95
  Mid-Layer 2 w0.1: v2(60.307,20.691) 60.622,20.376 92.358,20.376 93.262,19.471 v2(122.771,19.471)
  other v3: 122.771,19.471 60.307,20.691
P1.21/XL2: SB2.1 SB4.1 U1.C7 | length 10.4
  Top Side w0.15: SB4.1@122.772,24.65 122.738,24.685 v6(122.738,25.139) 122.738,25.616 SB2.1@122.772,25.65
  Mid-Layer 2 w0.1: v5(122.737,28.32) 124.316,29.899 124.76,29.899 125.713,30.851 125.713,32.898 ccw(c125.568,32.898) v9(125.67,33) v9@125.67,32.998
  Mid-Layer 5 w0.1: v6(122.738,25.139) v5(122.737,28.32)
  other v2: 122.738,25.139
  other v3: 122.738,25.139
  other v4: 122.738,25.139 122.737,28.32
  other v5: 122.738,25.139
  other v6: 122.737,28.32
  other v8: 125.67,33
P1.22: P3.9 Q4.1 R32.1 U1.D6 | length 91.8
  Top Side w0.1: P3.9@61.78,22.27 P3.9@61.78,22.86 61.78,23.781 62.573,24.573 62.573,30.575 63.143,31.145 v2(63.143,32.003) ; v1(115.635,48.392) 116.684,48.392 Q4.1@116.75,48.325
  Mid-Layer 3 w0.1: v4(125.984,32.831) 126.02,32.868 v9(126.02,33.35)
  Mid-Layer 4 w0.1: v2(63.143,32.003) 63.794,32.003 64.114,32.322 89.793,32.322 92.002,34.532 v6(116.295,34.532) 118.152,34.532 120.589,32.096 124.902,32.096 125.637,32.831 v4(125.984,32.831)
  Mid-Layer 5 w0.1: v1(115.635,48.392) 115.103,47.861 115.103,44.738 116.295,43.546 v6(116.295,34.532)
  other v3: 63.143,32.003
  other v4: 63.143,32.003
  other v5: 63.143,32.003
  other v8: 126.02,33.35
  other v11: 126.02,33.35
P1.23: P3.10 U1.B7 | length 67.3
  Mid-Layer 1 w0.1: v9(125.463,32.386) 125.67,32.594 v8(125.67,32.65)
  Mid-Layer 2 w0.1: v3(61.78,28.489) 62.305,27.965 77.083,27.965 78.531,26.516 118.404,26.516 123.805,31.918 124.994,31.918 v9(125.463,32.386)
  other v2: 61.78,28.489
P1.24: P3.11 U1.D7 | length 75.2
  Top Side w0.1: v1(63.51,32.533) 63.51,24.59 64.32,23.78 P3.11@64.32,22.86 P3.11@64.32,22.27
  Mid-Layer 3 w0.1: v4(125.257,32.954) 125.274,32.954 v8(125.67,33.35)
  Mid-Layer 4 w0.1: v1(63.51,32.533) 89.653,32.533 91.869,34.749 104.915,34.749 105.008,34.842 118.198,34.842 120.737,32.303 124.606,32.303 v4(125.257,32.954)
  other v9: 125.67,33.35
  other v11: 125.67,33.35
P1.25: P3.12 Q5.1 R29.1 U1.E7 | length 83.2
  Top Side w0.1: P3.12@64.32,27.35 64.32,29.922 64.806,30.407 v2@64.806,32.888 ; v1(121.967,48.392) 121.973,48.385 R29.1@122.4,48.385 122.99,48.385 Q5.1@123.05,48.325
  Mid-Layer 3 w0.1: v4(123.991,33.504) 125.408,33.504 125.604,33.7 v8(125.67,33.7)
  Mid-Layer 4 w0.1: v4(64.803,32.892) 89.699,32.892 91.843,35.035 104.583,35.035 104.7,35.152 v6(120.78,35.152) 122.343,35.152 v4(123.991,33.504)
  Mid-Layer 5 w0.1: v6(120.78,35.152) 121.143,35.514 121.143,47.568 v1(121.967,48.392)
  other v2: 64.803,32.892
  other v3: 64.803,32.892
  other v5: 64.803,32.892
  other v9: 125.67,33.7
  other v11: 125.67,33.7
P1.26: P3.13 SW1.2 U1.B8 | length 92.9
  Top Side w0.1: P3.13@66.86,22.27 66.86,23.796 67.561,24.496 67.561,29.137 v3(67.986,29.562) ; SW1.2@113.948,13.85 SW1.2@120.698,13.85 121.608,13.85 121.672,13.914 v1(121.672,15.027)
  Mid-Layer 1 w0.1: v9(123.974,32.476) 124.634,32.476 124.767,32.343 125.017,32.343 125.32,32.647 v8(125.32,32.65)
  Mid-Layer 2 w0.1: v3(67.986,29.562) 67.989,29.565 75.774,29.565 78.609,26.73 118.174,26.73 v5(121.669,30.224) ; v5@121.672,30.227 v5(121.669,30.224) ; v9(123.974,32.476) 123.921,32.476 v5(121.669,30.224)
  Mid-Layer 5 w0.1: v1(121.672,15.027) v6@121.672,30.227
  other v2: 67.986,29.562
  other v4: 121.669,30.224
  other v6: 121.669,30.224
P1.27: P3.14 Q6.1 R30.1 U1.C8 | length 76.6
  Top Side w0.1: P3.14@66.86,27.35 v2(66.86,29.905) ; v1(115.689,44.688) 115.692,44.685 R30.1@116.1,44.685 116.69,44.685 Q6.1@116.75,44.625
  Mid-Layer 2 w0.1: v2(66.86,29.905) 90.976,29.905 93.117,32.045 116.151,32.045 116.262,31.934 v6(116.658,31.934) 119.184,31.934 119.631,32.382 121.924,32.382 122.276,32.734 124.618,32.734 124.883,33 v9(125.32,33)
  Mid-Layer 5 w0.1: v1(115.689,44.688) 116.659,43.718 116.659,31.961 v6@116.658,31.96
  other v3: 66.86,29.905
  other v4: 116.658,31.934
  other v5: 116.658,31.934
  other v8: 125.32,33
P1.28: P3.15 Q7.1 R31.1 U1.D8 | length 77.9
  Top Side w0.1: P3.15@69.4,22.27 P3.15@69.4,22.86 69.4,23.783 70.458,24.841 v2(70.458,30.228) ; v1(121.943,44.688) 122.987,44.688 Q7.1@123.05,44.625
  Mid-Layer 2 w0.1: v2(70.458,30.228) 91,30.228 93.021,32.249 118.37,32.249 118.824,32.703 v6(121.352,32.703) 121.902,32.703 122.223,33.023 124.621,33.023 124.948,33.35 v9(125.32,33.35)
  Mid-Layer 5 w0.1: v6(121.352,32.703) 121.352,44.097 v1(121.943,44.688)
  other v3: 70.458,30.228
  other v4: 121.352,32.703
  other v5: 121.352,32.703
  other v8: 125.32,33.35
P1.29: P3.16 U1.H10 | length 60.9
  Top Side w0.1: P3.16@69.4,27.35 69.4,31.749 v2@69.402,31.751 ; v2(120.811,34.842) 122.222,34.842 122.314,34.75 ; 122.314,34.751 U1.H10@124.62,34.75
  Mid-Layer 2 w0.1: v2(69.402,31.776) 91.036,31.776 92.538,33.279 116.045,33.279 117.609,34.842 v2(120.811,34.842)
  other v3: 69.402,31.776 120.811,34.842
P1.30: P3.17 U1.J10 | length 63.3
  Top Side w0.1: P3.17@71.94,22.27 71.94,23.795 73.023,24.878 v2(73.023,32.096) ; v2(121.926,35.368) 123.049,35.368 123.317,35.1 U1.J10@124.62,35.1
  Mid-Layer 2 w0.1: v2(73.023,32.096) 91.025,32.096 92.424,33.495 105.003,33.495 115.971,33.495 117.844,35.368 v2(121.926,35.368)
  other v3: 73.023,32.096 121.926,35.368
P1.31: P3.18 U1.K9 | length 61.8
  Top Side w0.1: P3.18@71.94,27.35 71.94,31.851 72.778,32.689 v2(72.778,35.971) ; v2(120.51,36.387) 123.643,36.387 124.313,35.717 124.832,35.717 124.97,35.579 U1.K9@124.97,35.45
  Mid-Layer 2 w0.1: v2(72.778,35.971) 101.775,35.971 102.191,36.387 v2(120.51,36.387)
  other v1: 71.94,29.025
  other v3: 72.778,35.971 120.51,36.387
P2.00: TP13.1 U1.B10 U15.2 | length 37.7
  Top Side w0.127: v3(121.968,31.12) 121.968,31.571 123.047,32.65 U1.B10@124.62,32.65
  Mid-Layer 1 w0.1: v2(91.892,27.335) 91.892,28.215 92.958,29.281 v3(95.601,29.281)
  Mid-Layer 2 w0.1: v3(95.601,29.281) 97.95,26.932 117.78,26.932 v3(121.968,31.12)
  other v2: 95.601,29.281 121.968,31.12
P2.00_A: P4.3 P17.21 U15.16 | length 60.1
  Top Side w0.1: P17.21@77.02,10.16 v2(77.02,10.162)
  Top Side w0.2: v1(92.111,47.668) 92.112,47.67 P4.3@92.895,47.67
  Mid-Layer 1 w0.1: v1(94.73,28.925) v3(95.35,28.306)
  Mid-Layer 2 w0.1: v2(77.02,10.162) 77.954,9.228 v6(94.729,9.228)
  Mid-Layer 5 w0.1: v6(94.729,9.228) 94.73,9.23 v1(94.73,28.925)
  Mid-Layer 6 w0.1: v1(92.111,47.668) 91.928,47.486 91.928,30.636 93.261,29.304 93.894,29.304 93.942,29.351 94.304,29.351 v1(94.73,28.925)
  other v2: 95.35,28.306
  other v3: 77.02,10.162
  other v4: 94.729,9.228
  other v5: 94.729,9.228
P2.00_B: U4.7 U15.1 | length 1.8
  Top Side w0.1: U4.7@97.203,28.883 U4.7@97.234,28.853
  Top Side w0.152: U15.1@95.475,28.883 U4.7@97.203,28.883
P2.01: TP29.1 U1.C10 U15.5 | length 34.9
  Top Side w0.127: v3(121.493,31.444) 123.05,33 U1.C10@124.62,33
  Mid-Layer 1 w0.1: v2(91.892,29.464) 92.47,30.042 94.737,30.042 v3(95.353,30.658)
  Mid-Layer 2 w0.1: v3(95.353,30.658) 96.052,31.357 101.891,31.357 102.746,30.502 120.159,30.502 121.101,31.444 v3(121.493,31.444)
  other v2: 95.353,30.658 121.493,31.444
P2.01_A: P4.4 P17.22 U15.3 | length 57.3
  Top Side w0.1: v2(77.018,15.24) v2(77.018,15.24) ; v1(94.788,29.683) U15.3@95.525,29.683
  Mid-Layer 2 w0.1: v2(77.018,15.24) 78.015,16.237 94.358,16.237 v5(94.361,16.239)
  Mid-Layer 5 w0.1: v5(94.361,16.239) 94.361,29.256 v1(94.788,29.683)
  Mid-Layer 6 w0.1: v1(92.9,52.8) 92.9,45.483 92.134,44.717 92.134,31.262 93.354,30.042 94.429,30.042 v1(94.788,29.683)
  other v3: 77.018,15.24
  other v4: 94.361,16.239
  other v6: 94.361,16.239
P2.01_B: U4.6 U15.4 | length 1.7
  Top Side w0.152: U15.4@95.525,30.083 97.194,30.083 U4.6@97.234,30.123
P2.02: TP30.1 U1.D10 U15.7 | length 35
  Top Side w0.127: v2(121.12,31.756) 122.714,33.35 U1.D10@124.62,33.35
  Mid-Layer 1 w0.1: v2(91.876,31.593) 93.61,31.593 v3(94.55,30.653)
  Mid-Layer 2 w0.1: v3(94.55,30.653) 94.902,30.653 95.822,31.573 101.977,31.573 102.845,30.705 120.069,30.705 v2(121.12,31.756)
  other v2: 94.55,30.653
  other v3: 121.12,31.756
P2.02_A: P4.5 P17.23 U15.9 | length 55.3
  Top Side w0.1: P17.23@79.56,10.16 v2(79.56,10.17) ; v1(93.513,30.403) 93.833,30.083 U15.9@93.975,30.083
  Mid-Layer 2 w0.1: v2(79.56,10.17) 80.004,9.726 v6(94.035,9.727) v6(94.035,9.727) v5@94.136,9.727
  Mid-Layer 5 w0.1: v1(93.513,30.403) 94.035,29.881 v6(94.035,9.727)
  Mid-Layer 6 w0.1: v1(93.513,30.403) 92.339,31.577 92.339,44.639 v1(95.4,47.7)
  other v3: 79.56,10.17
  other v4: 94.035,9.727
  other v5: 94.035,9.727
P2.02_B: U4.5 U15.8 | length 3.7
  Top Side w0.152: U15.8@94.15,30.658 94.15,31.215 94.328,31.393 U4.5@97.234,31.393
P2.03: TP31.1 U1.E10 U16.2 | length 29.5
  Top Side w0.127: v2(120.785,30.364) 120.785,31.871 122.614,33.7 U1.E10@124.62,33.7
  Mid-Layer 1 w0.127: v2(102.808,26.146) 102.808,27.383 104.448,29.022 v3(104.448,29.695)
  Mid-Layer 2 w0.127: v3(104.448,29.695) 104.448,28.907 106.174,27.181 117.602,27.181 v2(120.785,30.364)
  other v2: 104.448,29.695
  other v3: 120.785,30.364
P2.03_A: P4.6 P17.24 U16.16 | length 69.9
  Top Side w0.1: P4.6@95.435,52.75 95.435,51.815 96.876,50.374 v1(98.56,50.374) ; v1(104.29,31.14) 104.623,30.807 U16.16@104.623,30.67
  Mid-Layer 2 w0.1: v2(79.56,15.24) 80.103,15.783 v5(105.997,15.783)
  Mid-Layer 5 w0.1: v1(104.29,31.14) 104.808,31.14 105.997,29.951 v6@105.997,15.784
  Mid-Layer 6 w0.1: v1(98.56,50.374) 98.56,47.568 102.683,43.445 102.683,32.747 v1(104.29,31.14)
  other v3: 79.56,15.24
  other v4: 105.997,15.783
  other v6: 105.997,15.783
P2.03_B: U4.3 U16.1 | length 1.7
  Top Side w0.152: U4.3@102.774,30.123 102.801,30.095 U16.1@104.498,30.095
P2.04: TP32.1 U1.F10 U16.7 | length 25.6
  Top Side w0.127: v2(120.118,30.199) 120.118,31.525 122.642,34.05 U1.F10@124.62,34.05
  Mid-Layer 1 w0.127: v2(104.938,26.146) 105.423,26.631 v2(105.423,28.381)
  Mid-Layer 2 w0.1: v3@120.116,30.201 v2(120.118,30.199)
  Mid-Layer 2 w0.127: v2(105.423,28.381) 106.389,27.415 117.334,27.415 v2(120.118,30.199)
  other v3: 105.423,28.381 120.118,30.199
P2.04_A: P4.7 P17.25 U16.9 | length 65.7
  Top Side w0.1: v1(105.284,29.061) 105.449,28.895 U16.9@105.998,28.895
  Mid-Layer 2 w0.1: v2(82.1,10.16) 105.378,10.16 v6(105.38,10.163)
  Mid-Layer 5 w0.1: v1(105.284,29.061) 105.38,28.964 v6(105.38,10.163)
  Mid-Layer 6 w0.1: v1(97.975,47.67) 98.302,47.342 98.475,47.342 102.462,43.356 102.462,32.385 104.387,30.46 105.488,30.46 105.713,30.235 105.713,29.49 v1(105.284,29.061)
  other v3: 82.1,10.16
  other v4: 105.38,10.163
  other v5: 105.38,10.163
P2.04_B: U4.2 U16.8 | length 4.4
  Top Side w0.152: U4.2@102.774,28.853 103.142,28.853 104.631,27.364 105.425,27.364 105.823,27.763 U16.8@105.823,28.32
P2.05: TP33.1 U1.G9 U16.10 | length 28
  Mid-Layer 1 w0.1: v3(106.543,33.8) 106.544,29.728 v2(106.111,29.295) 106.111,27.101 v2(107.067,26.146) ; v3(121.494,35.687) 122.561,35.687 123.848,34.4 v8(124.97,34.4)
  Mid-Layer 2 w0.1: v3(106.543,33.8) 115.935,33.8 117.822,35.687 v3(121.494,35.687)
P2.05_A: P4.8 P17.26 U16.12 | length 66.1
  Top Side w0.1: P17.26@82.1,15.24 v2(82.1,15.242) ; v1(105.346,30.095) U16.12@105.998,30.095
  Mid-Layer 2 w0.1: v2(82.1,15.242) 105.659,15.242 v5@105.661,15.243
  Mid-Layer 5 w0.1: v1(105.346,30.095) 105.686,29.755 v5(105.686,15.243)
  Mid-Layer 6 w0.1: v1(98,52.9) 97.602,52.502 97.602,47.517 98.725,46.393 99.133,46.393 102.252,43.274 102.252,32.302 104.459,30.095 v1(105.346,30.095)
  other v3: 82.1,15.242
  other v4: 105.686,15.243
  other v6: 105.686,15.243
P2.05_B: U4.1 U16.11 | length 6.8
  Top Side w0.152: U4.1@102.774,27.583 103.128,27.583 103.609,27.101 105.544,27.101 106.855,28.413 106.855,29.458 106.618,29.695 U16.11@105.998,29.695
P2.06: P4.9 P12.12 U1.B9 | length 59
  Top Side w0.1: v1(124.057,59.228) P12.12@124.057,60.676
  Mid-Layer 1 w0.1: v3(119.179,32.394) 119.61,32.825 124.792,32.825 124.967,32.65 v8(124.97,32.65)
  Mid-Layer 2 w0.1: v1(100.515,47.67) 104.946,52.1 v1(121.3,52.1) 124.057,54.857 v1(124.057,59.228)
  Mid-Layer 5 w0.1: v3(119.179,32.394) 119.179,49.845 121.3,51.966 v1(121.3,52.1)
  other v4: 119.179,32.394
  other v5: 119.179,32.394
  other v6: 119.179,32.394
P2.07: P4.10 P11.6 P12.6 P12.14 U1.C9 U7.13 | length 150.3
  Top Side w0.1: U7.13@35.47,23.342 v3(35.47,28.394) ; v1(120.247,59.228) P12.6@120.247,60.676 ; v1(125.327,59.228) P12.14@125.327,60.676
  Mid-Layer 1 w0.1: v4(117.093,32.744) 117.376,33.027 124.94,33.027 124.967,33 v8(124.97,33)
  Mid-Layer 2 w0.1: v3(35.47,28.394) 35.472,28.396 59.558,28.396 60.043,28.881 65.318,28.881 67.063,30.626 91.093,30.626 92.918,32.452 116.801,32.452 v4(117.093,32.744)
  Mid-Layer 3 w0.1: v1(100.515,52.75) 102.566,54.8 v1(117.4,54.8) 120.247,57.647 v1(120.247,59.228) 120.666,59.647 124.908,59.647 v1(125.327,59.228)
  Mid-Layer 5 w0.1: v4(117.093,32.744) 117.093,54.494 v1(117.4,54.8)
  other v2: 35.47,28.394
  other v3: 117.093,32.744
  other v5: 117.093,32.744
  other v6: 117.093,32.744
P2.08: P4.11 P12.16 U1.D9 | length 63
  Top Side w0.1: P4.11@103.055,47.67 cw(c103.055,47.725) 103,47.725 103,49.856 103.645,50.5 116.955,50.5 118.387,51.932 v1(118.387,54.35) ; v1(126.597,59.228) P12.16@126.597,60.676
  Mid-Layer 1 w0.1: v4(117.473,33.355) 117.622,33.505 124.812,33.505 124.967,33.35 v8(124.97,33.35)
  Mid-Layer 3 w0.1: v1(118.387,54.35) 124.176,54.35 126.597,56.771 v1(126.597,59.228)
  Mid-Layer 5 w0.1: v4(117.473,33.355) 117.473,53.436 v1(118.387,54.35)
  other v3: 117.473,33.355
  other v5: 117.473,33.355
  other v6: 117.473,33.355
P2.09: P4.12 P12.18 U1.E9 | length 57.1
  Top Side w0.1: v1(127.867,59.228) P12.18@127.867,60.676
  Mid-Layer 1 w0.1: v4(118.008,33.846) 118.135,33.718 124.922,33.718 cw(c124.922,33.667) v8@124.964,33.696
  Mid-Layer 3 w0.1: v1(103.055,52.75) 104.106,53.8 v1(118.8,53.8) 119.13,54.13 124.255,54.13 126.824,56.699 126.824,58.186 v1(127.867,59.228)
  Mid-Layer 5 w0.1: v4(118.008,33.846) 118,33.854 118,53 v1(118.8,53.8)
  other v3: 118.008,33.846
  other v5: 118.008,33.846
  other v6: 118.008,33.846
  other v8: 124.97,33.7
P2.10: P4.13 P12.20 U1.F9 | length 59.1
  Top Side w0.1: P4.13@105.595,47.67 105.595,48.598 107.097,50.1 122.963,50.1 ccw(c122.963,50.19) 123.026,50.127 v1(123.8,50.9) ; v1(129.137,59.228) P12.20@129.137,60.676
  Mid-Layer 1 w0.1: v6(119.623,34.161) 121.741,34.161 121.855,34.047 v8@124.965,34.047
  Mid-Layer 3 w0.1: v1(123.8,50.9) 126.97,50.9 129.137,53.067 v1(129.137,59.228)
  Mid-Layer 5 w0.1: v6(119.623,34.161) 119.623,48.901 121.623,50.9 v1(123.8,50.9)
  other v3: 119.623,34.161
  other v4: 119.623,34.161
  other v5: 119.623,34.161
  other v8: 124.97,34.05
P3.00: P5.3 P17.9 U1.H7 | length 90.5
  Top Side w0.1: P17.9@61.78,10.16 v2(61.78,10.169)
  Mid-Layer 2 w0.1: v2(61.78,10.169) 62.768,11.156 v6(92.699,11.156)
  Mid-Layer 3 w0.1: v4(124.034,34.945) 124.507,34.945 124.701,34.75 v8(125.67,34.75)
  Mid-Layer 4 w0.1: v6(92.895,36.645) 93.584,35.956 122.738,35.956 123.75,34.945 v4(124.034,34.945)
  Mid-Layer 5 w0.1: v6(92.699,11.156) 92.701,11.158 92.701,32.082 92.895,32.277 v6(92.895,36.645)
  other v2: 92.895,36.645
  other v3: 61.78,10.169 92.895,36.645
  other v4: 92.699,11.156 92.895,36.645
  other v5: 92.699,11.156 92.895,36.645
  other v9: 125.67,34.75
  other v11: 125.67,34.75
P3.01: P5.4 P17.10 U1.H6 | length 94.9
  Top Side w0.1: v2(61.775,15.24) P17.10@61.78,15.24
  Mid-Layer 2 w0.1: v2(61.775,15.24) 63.315,13.7 v5(93.05,13.701) ; v2(92.895,40.64) 93.21,40.955 117.843,40.955 123.736,35.061 125.757,35.061 126.02,34.797 v9(126.02,34.75)
  Mid-Layer 5 w0.1: v2(92.895,40.64) 93.214,40.321 93.214,32.041 93.05,31.876 v5(93.05,13.701)
  other v3: 61.775,15.24 92.895,40.64
  other v4: 93.05,13.701 92.895,40.64
  other v5: 92.895,40.64
  other v6: 93.05,13.701 92.895,40.64
  other v8: 126.02,34.75
P3.02: P5.5 P17.13 U1.H5 | length 103.8
  Mid-Layer 2 w0.1: v2(66.86,10.16) 67.42,10.72 v6(95.193,10.72) ; v5(94.573,43.698) 126.606,43.698 127.482,42.822 127.482,39.085 127.195,38.798 127.195,35.58 126.37,34.756 v8(126.37,34.75)
  Mid-Layer 5 w0.1: v5(94.573,43.698) 94.573,38.145 95.435,37.284 v6(95.435,35.56) 95.435,25.73 95.194,25.489 v6(95.193,10.72) v6(95.193,10.72)
  other v2: 95.435,35.56
  other v3: 66.86,10.16 95.435,35.56
  other v4: 95.193,10.72 95.435,35.56 94.573,43.698
  other v5: 95.193,10.72 95.435,35.56
  other v6: 94.573,43.698
  other v9: 126.37,34.75
P3.03: P5.6 P17.14 U1.H4 | length 102.6
  Top Side w0.1: P17.14@66.86,15.24 v2(66.864,15.24)
  Mid-Layer 2 w0.1: v2(66.864,15.24) 67.874,14.23 v5@95.421,14.23 ; v5(95.435,44.819) 95.929,45.313 125.985,45.313 128.149,43.149 128.149,38.03 127.478,37.359 127.478,35.525 126.72,34.767 v8(126.72,34.75)
  Mid-Layer 5 w0.1: v5(95.435,44.819) v6(95.435,40.64) 95.435,38.492 95.739,38.188 95.739,25.666 95.524,25.45 v5(95.524,14.23)
  other v2: 95.435,40.64
  other v3: 66.864,15.24 95.435,40.64
  other v4: 95.524,14.23 95.435,40.64 95.435,44.819
  other v5: 95.435,40.64
  other v6: 95.524,14.23 95.435,44.819
  other v9: 126.72,34.75
P3.04: P5.7 P17.4 U1.J4 | length 114.9
  Top Side w0.1: P17.4@54.16,15.24 v2(54.16,15.243)
  Mid-Layer 1 w0.1: v8(126.72,35.1) 126.72,35.464 127.512,36.256 v3(127.512,38.624)
  Mid-Layer 2 w0.1: v2(54.16,15.243) 56.208,13.195 v5(97.781,13.195) ; v5(97.185,44.006) 126.657,44.006 127.708,42.955 127.708,38.821 v3(127.512,38.624)
  Mid-Layer 5 w0.1: v5(97.185,44.006) 97.185,36.35 v6(97.975,35.56) 97.781,35.366 v5(97.781,13.195)
  other v2: 97.975,35.56
  other v3: 54.16,15.243 97.975,35.56
  other v4: 97.781,13.195 97.975,35.56 97.185,44.006
  other v5: 97.975,35.56
  other v6: 97.781,13.195 97.185,44.006
P3.05: P5.8 P17.3 U1.G7 | length 101.7
  Top Side w0.1: P17.3@54.16,10.16 v2(54.166,10.16)
  Mid-Layer 2 w0.1: v2(54.166,10.16) 55.681,11.675 v6(98.177,11.675)
  Mid-Layer 3 w0.1: v4(124.55,34.419) 124.569,34.4 v11(125.67,34.4)
  Mid-Layer 4 w0.1: v6(99.065,35.603) 103.761,35.603 103.911,35.752 122.648,35.752 123.981,34.419 v4(124.55,34.419)
  Mid-Layer 5 w0.1: v6(97.975,40.64) 97.975,39.485 99.065,38.395 v6(99.065,35.603) 98.177,34.715 v6(98.177,11.675)
  other v2: 97.975,40.64
  other v3: 54.166,10.16 97.975,40.64
  other v4: 98.177,11.675 97.975,40.64
  other v5: 98.177,11.675 97.975,40.64
  other v8: 125.67,34.4
  other v9: 125.67,34.4